# EAGLE board esp32_lora_gateway-Panel (EAGLE 9.0.1), part 1 of 2
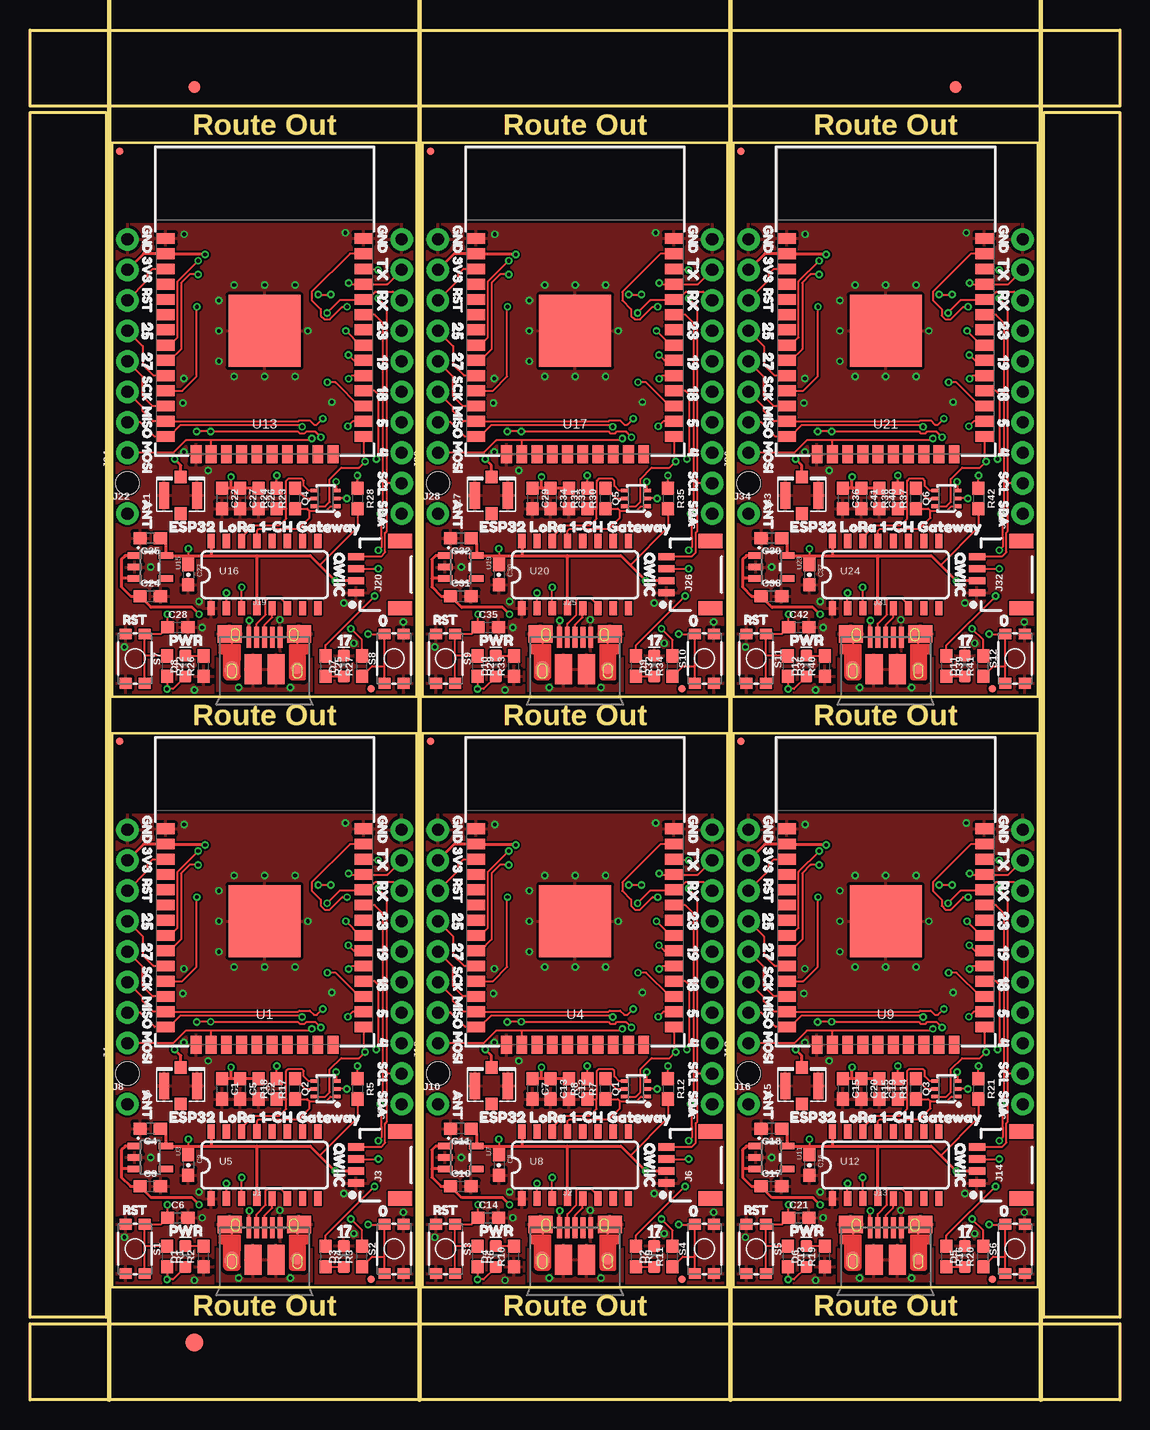
[diagram p0: board, top side]
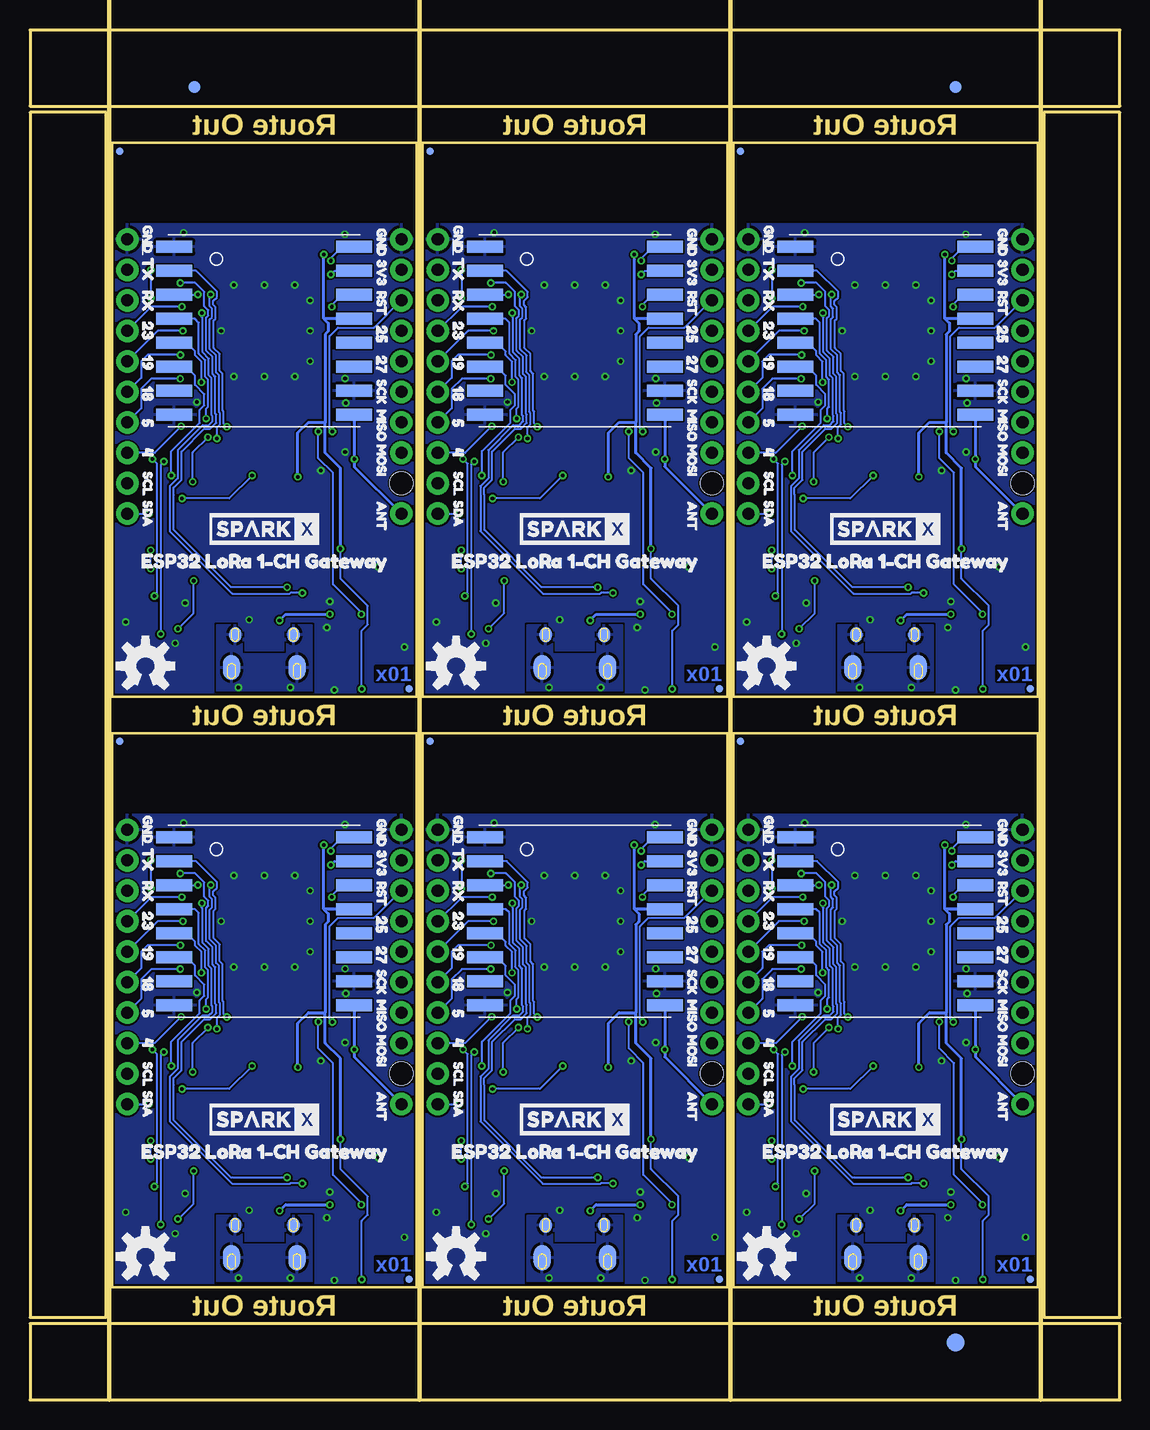
[diagram p1: board, bottom side, seen from below]

Size 90.87 x 114.15 mm. Coordinates in mm from the lower left corner, seen from the top.
Outline: 6.86,9.4 32.24,9.4 32.24,55.55 6.86,55.55 6.86,9.4
Outline: 32.75,9.4 58.13,9.4 58.13,55.55 32.75,55.55 32.75,9.4
Outline: 58.63,9.4 84.01,9.4 84.01,55.55 58.63,55.55 58.63,9.4
Outline: 6.86,58.6 32.24,58.6 32.24,104.75 6.86,104.75 6.86,58.6
Outline: 32.75,58.6 58.13,58.6 58.13,104.75 32.75,104.75 32.75,58.6
Outline: 58.63,58.6 84.01,58.6 84.01,104.75 58.63,104.75 58.63,58.6
Outline: 0,6.35 90.87,6.35 90.87,0 0,0 0,6.35
Outline: 84.52,107.29 90.87,107.29 90.87,6.86 84.52,6.86 84.52,107.29
Outline: 0,114.15 90.87,114.15 90.87,107.8 0,107.8 0,114.15
Outline: 0,107.29 6.35,107.29 6.35,6.86 0,6.86 0,107.29
Copper layers (1*16): Top 0.035mm / dielectric 1.5mm / Bottom 0.035mm
Design rules "SparkFun-2-layer-PCBWay-LIMIT": minimum track width 6mil, minimum drill 0.3mm, track to track 6mil, track to pad 6mil, pad to pad 6mil, via to via 6mil, smd to smd 6mil, copper to edge 6mil, drill to drill 6mil, minimum pad ring 6mil, minimum via ring 6mil, stop-mask expansion 4mil, vias tented up to drill 25mil, thermal gap 10mil
Net classes: 0 default: width 0.152 mm, drill 0.305 mm
Holes 1.93 mm at 8.13,27.18 34.02,27.18 59.9,27.18 8.13,76.38 34.02,76.38 59.9,76.38
Milling: 4 lines

## Footprints (pad centres in the part's own frame; a part is rotated, then mirrored left to right if it is on the bottom)
0603 = smd 1.1 x 1: 1 -0.85,0; 2 0.85,0
0603-CAP = smd 1.1 x 1: 1 -0.85,0; 2 0.85,0
LED-0603 = smd 1 x 1: A -0.877,0; C 0.877,0
FIDUCIAL-1X2 = smd 1 x 1: 1 0,0
FIDUCIAL-1.5X3 = smd 1.5 x 1.5: 1 0,0
FIDUCIAL-MICRO = smd 0.635 x 0.635: 1 0,0
USB-MICROB-PTH-MILL = smd 0.4 x 1.75: D+ 0,0; D- -0.65,0; GND 1.3,0; ID 0.65,0; VBUS -1.3,0 | smd 2 x 1.46: SHIELD -2.9,0.275; SHIELD2 2.9,0.275 | smd 1.425 x 2.5: SHIELD3 -0.963,-2.675; SHIELD4 0.963,-2.675 | smd 1.4 x 2.1 bottom: SHIELD5 -2.731,-2.531; SHIELD7 2.729,-2.531 | smd 1 x 1: SHIELD6 2.7,-2.575 | smd 1.1 x 1.5: SHIELD8 -2.731,-2.731 | smd 1 x 1.3 bottom: SHIELD9 -2.43,0.195; SHIELD10 2.43,0.195
1X04_1MM_RA = smd 0.6 x 1.35: 1 -1.5,0; 2 -0.5,0; 3 0.5,0; 4 1.5,0 | smd 1.2 x 2: NC1 2.8,-3.675; NC2 -2.8,-3.675
1X08_NO_SILK = drill 1.016 pad 1.88: 1 0,0; 2 2.54,0; 3 5.08,0; 4 7.62,0; 5 10.16,0; 6 12.7,0; 7 15.24,0; 8 17.78,0
U.FL = smd 2.2 x 0.85: 1 0,1.375; 2 0,-1.375 | smd 1.05 x 1: FEED 1.525,0; NC -1.525,0
1X01_NO_SILK = drill 1.016 pad 1.88: 1 0,0
1X10_NO_SILK = drill 1.016 pad 1.88: 1 0,0; 2 2.54,0; 3 5.08,0; 4 7.62,0; 5 10.16,0; 6 12.7,0; 7 15.24,0; 8 17.78,0; 9 20.32,0; 10 22.86,0
SC70-6 = smd 0.3 x 0.66: 1 -0.65,-0.92; 2 0,-0.92; 3 0.65,-0.92; 4 0.65,0.92; 5 0,0.92; 6 -0.65,0.92
TACTILE_SWITCH_SMD_4.6X2.8MM = smd 0.9 x 1: 1 -2.05,-0.8; 2 2.05,-0.8; 3 2.05,0.8; 4 -2.05,0.8
ESP-WROOM-32-NARROW = smd 0.9 x 1.5: 1 6.43,8.238; 2 5.16,8.238; 3 3.89,8.238; 4 2.62,8.238; 5 1.35,8.238; 6 0.08,8.238; 7 -1.19,8.238; 8 -2.46,8.238; 9 -3.73,8.238; 10 -5,8.238; 11 -6.27,8.238; 12 -7.54,8.238; 13 -8.81,8.238; 14 -10.08,8.238; 25 -10.08,-8.238; 26 -8.81,-8.238; 27 -7.54,-8.238; 28 -6.27,-8.238; 29 -5,-8.238; 30 -3.73,-8.238; 31 -2.46,-8.238; 32 -1.19,-8.238; 33 0.08,-8.238; 34 1.35,-8.238; 35 2.62,-8.238; 36 3.89,-8.238; 37 5.16,-8.238; 38 6.43,-8.238 | smd 1.5 x 0.9: 15 -11.57,5.715; 16 -11.57,4.445; 17 -11.57,3.175; 18 -11.57,1.905; 19 -11.57,0.635; 20 -11.57,-0.635; 21 -11.57,-1.905; 22 -11.57,-3.175; 23 -11.57,-4.445; 24 -11.57,-5.715 | smd 6 x 6: GND -1.27,0
RFM95/96/97/98W = smd 3 x 1: 3.3V 7.5,1; !RESET -7.5,-3; ANT 7.5,-7; DIO0 7.5,3; DIO1 7.5,5; DIO2 7.5,7; DIO3 7.5,-3; DIO4 7.5,-1; DIO5 -7.5,-5; GND@1 -7.5,7; GND@2 -7.5,-7; GND@3 7.5,-5; MISO -7.5,5; MOSI -7.5,3; NSS -7.5,-1; SCK -7.5,1
SOT23-5 = smd 0.55 x 1.2: 1 -0.95,-1.3; 2 0,-1.3; 3 0.95,-1.3; 4 0.95,1.3; 5 -0.95,1.3
SO016 = smd 0.6 x 1.2: 1 -4.445,-2.8; 2 -3.175,-2.8; 3 -1.905,-2.8; 4 -0.635,-2.8; 5 0.635,-2.8; 6 1.905,-2.8; 7 3.175,-2.8; 8 4.445,-2.8; 9 4.445,2.8; 10 3.175,2.8; 11 1.905,2.8; 12 0.635,2.8; 13 -0.635,2.8; 14 -1.905,2.8; 15 -3.175,2.8; 16 -4.445,2.8

## Placement (x,y rotation side)
C1  4.7uF  [0603]  16,25.91 270 top
C2  10uF  [0603]  19.05,25.91 270 top
C3  1.0uF  [0603]  10.03,17.78 0 top
C4  1.0uF  [0603]  10.03,22.61 180 top
C5  0.1uF  [0603]  17.53,25.91 270 top
C6  0.1uF  [0603]  12.32,15.16 0 top
C7  4.7uF  [0603]  41.89,25.91 270 top
C8  0.1uF  [0603-CAP]  39.1,19.56 270 top
C9  0.1uF  [0603-CAP]  13.21,19.56 270 top
C10  1.0uF  [0603]  35.92,17.78 0 top
C11  1.0uF  [0603]  35.92,22.61 180 top
C12  10uF  [0603]  44.94,25.91 270 top
C13  0.1uF  [0603]  43.41,25.91 270 top
C14  0.1uF  [0603]  38.21,15.16 0 top
C15  4.7uF  [0603]  67.78,25.91 270 top
C16  0.1uF  [0603-CAP]  64.98,19.56 270 top
C17  1.0uF  [0603]  61.81,17.78 0 top
C18  1.0uF  [0603]  61.81,22.61 180 top
C19  10uF  [0603]  70.83,25.91 270 top
C20  0.1uF  [0603]  69.3,25.91 270 top
C21  0.1uF  [0603]  64.09,15.16 0 top
C22  4.7uF  [0603]  16,75.11 270 top
C23  0.1uF  [0603-CAP]  13.21,68.76 270 top
C24  1.0uF  [0603]  10.03,66.98 0 top
C25  1.0uF  [0603]  10.03,71.81 180 top
C26  10uF  [0603]  19.05,75.11 270 top
C27  0.1uF  [0603]  17.53,75.11 270 top
C28  0.1uF  [0603]  12.32,64.36 0 top
C29  4.7uF  [0603]  41.89,75.11 270 top
C30  0.1uF  [0603-CAP]  39.1,68.76 270 top
C31  1.0uF  [0603]  35.92,66.98 0 top
C32  1.0uF  [0603]  35.92,71.81 180 top
C33  10uF  [0603]  44.94,75.11 270 top
C34  0.1uF  [0603]  43.41,75.11 270 top
C35  0.1uF  [0603]  38.21,64.36 0 top
C36  4.7uF  [0603]  67.78,75.11 270 top
C37  0.1uF  [0603-CAP]  64.98,68.76 270 top
C38  1.0uF  [0603]  61.81,66.98 0 top
C39  1.0uF  [0603]  61.81,71.81 180 top
C40  10uF  [0603]  70.83,75.11 270 top
C41  0.1uF  [0603]  69.3,75.11 270 top
C42  0.1uF  [0603]  64.09,64.36 0 top
D1  RED  [LED-0603]  12.95,11.94 90 top
D2  BLUE  [LED-0603]  52.05,11.94 90 top
D3  BLUE  [LED-0603]  26.16,11.94 90 top
D4  RED  [LED-0603]  38.84,11.94 90 top
D5  BLUE  [LED-0603]  77.94,11.94 90 top
D6  RED  [LED-0603]  64.73,11.94 90 top
D7  BLUE  [LED-0603]  26.16,61.14 90 top
D8  RED  [LED-0603]  12.95,61.14 90 top
D9  BLUE  [LED-0603]  52.05,61.14 90 top
D10  RED  [LED-0603]  38.84,61.14 90 top
D11  BLUE  [LED-0603]  77.94,61.14 90 top
D12  RED  [LED-0603]  64.73,61.14 90 top
E$1  [FIDUCIAL-1X2]  13.72,109.39 0 top
E$2  [FIDUCIAL-1X2]  13.72,109.39 0 bottom
E$3  [FIDUCIAL-1X2]  77.16,109.39 0 top
E$4  [FIDUCIAL-1X2]  77.16,109.39 0 bottom
E$5  [FIDUCIAL-1.5X3]  13.72,4.76 0 top
E$6  [FIDUCIAL-1.5X3]  13.72,4.76 0 bottom
FD1  FIDUCIALUFIDUCIAL  [FIDUCIAL-MICRO]  31.62,54.86 0 bottom
FD2  FIDUCIALUFIDUCIAL  [FIDUCIAL-MICRO]  7.49,10.03 0 bottom
FD3  FIDUCIALUFIDUCIAL  [FIDUCIAL-MICRO]  28.45,10.03 0 top
FD4  FIDUCIALUFIDUCIAL  [FIDUCIAL-MICRO]  7.49,54.86 0 top
FD5  FIDUCIALUFIDUCIAL  [FIDUCIAL-MICRO]  57.51,54.86 0 bottom
FD6  FIDUCIALUFIDUCIAL  [FIDUCIAL-MICRO]  33.38,10.03 0 bottom
FD7  FIDUCIALUFIDUCIAL  [FIDUCIAL-MICRO]  54.34,10.03 0 top
FD8  FIDUCIALUFIDUCIAL  [FIDUCIAL-MICRO]  33.38,54.86 0 top
FD9  FIDUCIALUFIDUCIAL  [FIDUCIAL-MICRO]  83.4,54.86 0 bottom
FD10  FIDUCIALUFIDUCIAL  [FIDUCIAL-MICRO]  59.27,10.03 0 bottom
FD11  FIDUCIALUFIDUCIAL  [FIDUCIAL-MICRO]  80.22,10.03 0 top
FD12  FIDUCIALUFIDUCIAL  [FIDUCIAL-MICRO]  59.27,54.86 0 top
FD13  FIDUCIALUFIDUCIAL  [FIDUCIAL-MICRO]  31.62,104.06 0 bottom
FD14  FIDUCIALUFIDUCIAL  [FIDUCIAL-MICRO]  7.49,59.23 0 bottom
FD15  FIDUCIALUFIDUCIAL  [FIDUCIAL-MICRO]  28.45,59.23 0 top
FD16  FIDUCIALUFIDUCIAL  [FIDUCIAL-MICRO]  7.49,104.06 0 top
FD17  FIDUCIALUFIDUCIAL  [FIDUCIAL-MICRO]  57.51,104.06 0 bottom
FD18  FIDUCIALUFIDUCIAL  [FIDUCIAL-MICRO]  33.38,59.23 0 bottom
FD19  FIDUCIALUFIDUCIAL  [FIDUCIAL-MICRO]  54.34,59.23 0 top
FD20  FIDUCIALUFIDUCIAL  [FIDUCIAL-MICRO]  33.38,104.06 0 top
FD21  FIDUCIALUFIDUCIAL  [FIDUCIAL-MICRO]  83.4,104.06 0 bottom
FD22  FIDUCIALUFIDUCIAL  [FIDUCIAL-MICRO]  59.27,59.23 0 bottom
FD23  FIDUCIALUFIDUCIAL  [FIDUCIAL-MICRO]  80.22,59.23 0 top
FD24  FIDUCIALUFIDUCIAL  [FIDUCIAL-MICRO]  59.27,104.06 0 top
J1  [USB-MICROB-PTH-MILL]  19.56,14.35 0 top
J2  [USB-MICROB-PTH-MILL]  45.45,14.35 0 top
J3  [1X04_1MM_RA]  27.18,19.56 90 top
J4  [1X08_NO_SILK]  8.13,29.72 90 top
J5  U.FL  [U.FL]  12.57,26.16 90 top
J6  [1X04_1MM_RA]  53.07,19.56 90 top
J7  U.FL  [U.FL]  38.46,26.16 90 top
J8  [1X01_NO_SILK]  8.13,24.64 0 top
J9  [1X10_NO_SILK]  30.99,24.64 90 top
J10  [1X01_NO_SILK]  34.02,24.64 0 top
J11  [1X10_NO_SILK]  56.88,24.64 90 top
J12  [1X08_NO_SILK]  34.02,29.72 90 top
J13  [USB-MICROB-PTH-MILL]  71.33,14.35 0 top
J14  [1X04_1MM_RA]  78.95,19.56 90 top
J15  U.FL  [U.FL]  64.35,26.16 90 top
J16  [1X01_NO_SILK]  59.9,24.64 0 top
J17  [1X10_NO_SILK]  82.76,24.64 90 top
J18  [1X08_NO_SILK]  59.9,29.72 90 top
J19  [USB-MICROB-PTH-MILL]  19.56,63.55 0 top
J20  [1X04_1MM_RA]  27.18,68.76 90 top
J21  U.FL  [U.FL]  12.57,75.36 90 top
J22  [1X01_NO_SILK]  8.13,73.84 0 top
J23  [1X10_NO_SILK]  30.99,73.84 90 top
J24  [1X08_NO_SILK]  8.13,78.92 90 top
J25  [USB-MICROB-PTH-MILL]  45.45,63.55 0 top
J26  [1X04_1MM_RA]  53.07,68.76 90 top
J27  U.FL  [U.FL]  38.46,75.36 90 top
J28  [1X01_NO_SILK]  34.02,73.84 0 top
J29  [1X10_NO_SILK]  56.88,73.84 90 top
J30  [1X08_NO_SILK]  34.02,78.92 90 top
J31  [USB-MICROB-PTH-MILL]  71.33,63.55 0 top
J32  [1X04_1MM_RA]  78.95,68.76 90 top
J33  U.FL  [U.FL]  64.35,75.36 90 top
J34  [1X01_NO_SILK]  59.9,73.84 0 top
J35  [1X10_NO_SILK]  82.76,73.84 90 top
J36  [1X08_NO_SILK]  59.9,78.92 90 top
LOGO1  SPARKX-LOGO4  [SPARKX-MEDIUM]  19.56,23.37 0 bottom
LOGO2  OSHW-LOGOM  [OSHW-LOGO-M]  29.46,11.94 0 bottom
LOGO3  SPARKX-LOGO4  [SPARKX-MEDIUM]  45.45,23.37 0 bottom
LOGO4  OSHW-LOGOM  [OSHW-LOGO-M]  55.35,11.94 0 bottom
LOGO5  SPARKX-LOGO4  [SPARKX-MEDIUM]  71.33,23.37 0 bottom
LOGO6  OSHW-LOGOM  [OSHW-LOGO-M]  81.24,11.94 0 bottom
LOGO7  SPARKX-LOGO4  [SPARKX-MEDIUM]  19.56,72.57 0 bottom
LOGO8  OSHW-LOGOM  [OSHW-LOGO-M]  29.46,61.14 0 bottom
LOGO9  SPARKX-LOGO4  [SPARKX-MEDIUM]  45.45,72.57 0 bottom
LOGO10  OSHW-LOGOM  [OSHW-LOGO-M]  55.35,61.14 0 bottom
LOGO11  SPARKX-LOGO4  [SPARKX-MEDIUM]  71.33,72.57 0 bottom
LOGO12  OSHW-LOGOM  [OSHW-LOGO-M]  81.24,61.14 0 bottom
Q1  MBT3904DW1T1  [SC70-6]  50.53,25.91 90 top
Q2  MBT3904DW1T1  [SC70-6]  24.64,25.91 90 top
Q3  MBT3904DW1T1  [SC70-6]  76.41,25.91 90 top
Q4  MBT3904DW1T1  [SC70-6]  24.64,75.11 90 top
Q5  MBT3904DW1T1  [SC70-6]  50.53,75.11 90 top
Q6  MBT3904DW1T1  [SC70-6]  76.41,75.11 90 top
R1  10k  [0603]  11.43,11.94 270 top
R2  1k  [0603]  14.48,11.94 90 top
R3  10k  [0603]  27.69,11.94 90 top
R4  1k  [0603]  24.64,11.94 270 top
R5  10k  [0603]  27.3,25.91 270 top
R6  10k  [0603]  37.32,11.94 270 top
R7  10k  [0603]  47.99,25.91 90 top
R8  10k  [0603]  46.46,25.91 90 top
R9  1k  [0603]  50.53,11.94 270 top
R10  1k  [0603]  40.37,11.94 90 top
R11  10k  [0603]  53.57,11.94 90 top
R12  10k  [0603]  53.19,25.91 270 top
R13  10k  [0603]  63.21,11.94 270 top
R14  10k  [0603]  73.87,25.91 90 top
R15  10k  [0603]  72.35,25.91 90 top
R16  1k  [0603]  76.41,11.94 270 top
R17  10k  [0603]  22.1,25.91 90 top
R18  10k  [0603]  20.57,25.91 90 top
R19  1k  [0603]  66.25,11.94 90 top
R20  10k  [0603]  79.46,11.94 90 top
R21  10k  [0603]  79.08,25.91 270 top
R22  10k  [0603]  11.43,61.14 270 top
R23  10k  [0603]  22.1,75.11 90 top
R24  10k  [0603]  20.57,75.11 90 top
R25  1k  [0603]  24.64,61.14 270 top
R26  1k  [0603]  14.48,61.14 90 top
R27  10k  [0603]  27.69,61.14 90 top
R28  10k  [0603]  27.3,75.11 270 top
R29  10k  [0603]  37.32,61.14 270 top
R30  10k  [0603]  47.99,75.11 90 top
R31  10k  [0603]  46.46,75.11 90 top
R32  1k  [0603]  50.53,61.14 270 top
R33  1k  [0603]  40.37,61.14 90 top
R34  10k  [0603]  53.57,61.14 90 top
R35  10k  [0603]  53.19,75.11 270 top
R36  10k  [0603]  63.21,61.14 270 top
R37  10k  [0603]  73.87,75.11 90 top
R38  10k  [0603]  72.35,75.11 90 top
R39  1k  [0603]  76.41,61.14 270 top
R40  1k  [0603]  66.25,61.14 90 top
R41  10k  [0603]  79.46,61.14 90 top
R42  10k  [0603]  79.08,75.11 270 top
S1  RESET  [TACTILE_SWITCH_SMD_4.6X2.8MM]  8.76,12.57 270 top
S2  RESET  [TACTILE_SWITCH_SMD_4.6X2.8MM]  30.35,12.57 90 top
S3  RESET  [TACTILE_SWITCH_SMD_4.6X2.8MM]  34.65,12.57 270 top
S4  RESET  [TACTILE_SWITCH_SMD_4.6X2.8MM]  56.24,12.57 90 top
S5  RESET  [TACTILE_SWITCH_SMD_4.6X2.8MM]  60.54,12.57 270 top
S6  RESET  [TACTILE_SWITCH_SMD_4.6X2.8MM]  82.13,12.57 90 top
S7  RESET  [TACTILE_SWITCH_SMD_4.6X2.8MM]  8.76,61.77 270 top
S8  RESET  [TACTILE_SWITCH_SMD_4.6X2.8MM]  30.35,61.77 90 top
S9  RESET  [TACTILE_SWITCH_SMD_4.6X2.8MM]  34.65,61.77 270 top
S10  RESET  [TACTILE_SWITCH_SMD_4.6X2.8MM]  56.24,61.77 90 top
S11  RESET  [TACTILE_SWITCH_SMD_4.6X2.8MM]  60.54,61.77 270 top
S12  RESET  [TACTILE_SWITCH_SMD_4.6X2.8MM]  82.13,61.77 90 top
U1  ESP-WROOM-32NARROW  [ESP-WROOM-32-NARROW]  19.56,41.15 90 top
U2  RFM96W  [RFM95/96/97/98W]  19.56,39.88 0 bottom
U3  3.3V  [SOT23-5]  10.03,20.19 270 top
U4  ESP-WROOM-32NARROW  [ESP-WROOM-32-NARROW]  45.45,41.15 90 top
U5  CH340C  [SO016]  19.56,19.56 0 top
U6  RFM96W  [RFM95/96/97/98W]  45.45,39.88 0 bottom
U7  3.3V  [SOT23-5]  35.92,20.19 270 top
U8  CH340C  [SO016]  45.45,19.56 0 top
U9  ESP-WROOM-32NARROW  [ESP-WROOM-32-NARROW]  71.33,41.15 90 top
U10  RFM96W  [RFM95/96/97/98W]  71.33,39.88 0 bottom
U11  3.3V  [SOT23-5]  61.81,20.19 270 top
U12  CH340C  [SO016]  71.33,19.56 0 top
U13  ESP-WROOM-32NARROW  [ESP-WROOM-32-NARROW]  19.56,90.35 90 top
U14  RFM96W  [RFM95/96/97/98W]  19.56,89.08 0 bottom
U15  3.3V  [SOT23-5]  10.03,69.39 270 top
U16  CH340C  [SO016]  19.56,68.76 0 top
U17  ESP-WROOM-32NARROW  [ESP-WROOM-32-NARROW]  45.45,90.35 90 top
U18  RFM96W  [RFM95/96/97/98W]  45.45,89.08 0 bottom
U19  3.3V  [SOT23-5]  35.92,69.39 270 top
U20  CH340C  [SO016]  45.45,68.76 0 top
U21  ESP-WROOM-32NARROW  [ESP-WROOM-32-NARROW]  71.33,90.35 90 top
U22  RFM96W  [RFM95/96/97/98W]  71.33,89.08 0 bottom
U23  3.3V  [SOT23-5]  61.81,69.39 270 top
U24  CH340C  [SO016]  71.33,68.76 0 top
U$1  [GND0]  9.78,49.34 270 top
U$2  [3V31]  9.78,46.74 270 top
U$3  [RST2]  9.78,44.13 270 top
U$4  [2517]  9.78,41.4 270 top
U$5  [279]  9.78,38.86 270 top
U$6  [SCK3]  9.78,36.77 270 top
U$7  [MISO4]  9.78,34.29 270 top
U$8  [MOSI5]  9.78,31.37 270 top
U$9  [ANT6]  9.78,26.52 270 top
U$10  [GND0]  29.4,49.34 270 top
U$11  [TX16]  29.4,46.74 270 top
U$12  [RX15]  29.4,44.07 270 top
U$13  [2314]  29.4,41.47 270 top
U$14  [1912]  29.4,38.61 270 top
U$15  [1811]  29.4,36.07 270 top
U$16  [513]  29.4,33.34 270 top
U$17  [410]  29.4,30.92 270 top
U$18  [SCL8]  29.4,28.83 270 top
U$19  [SDA7]  29.4,26.42 270 top
U$20  [RST2]  7.05,15.81 0 top
U$21  [020]  28.26,15.75 0 top
U$22  [PWR19]  10.79,14.1 0 top
U$23  [1722]  24.83,14.1 0 top
U$24  [QWIIC18]  25.78,22.35 270 top
U$25  [ESP32_LORA_1#CH_GATEWAY21]  10.79,23.56 0 top
U$26  [GND0]  29.27,49.34 270 bottom
U$27  [TX16]  29.27,46.74 270 bottom
U$28  [RX15]  29.27,44.07 270 bottom
U$29  [2314]  29.27,41.47 270 bottom
U$30  [1912]  29.27,38.61 270 bottom
U$31  [1811]  29.27,36.07 270 bottom
U$32  [513]  29.27,33.34 270 bottom
U$33  [410]  29.27,30.92 270 bottom
U$34  [SCL8]  29.27,28.83 270 bottom
U$35  [SDA7]  29.27,26.42 270 bottom
U$36  [ANT6]  9.78,26.39 270 bottom
U$37  [GND0]  9.78,49.09 270 bottom
U$38  [3V31]  9.78,46.48 270 bottom
U$39  [RST2]  9.78,43.88 270 bottom
U$40  [2517]  9.78,41.15 270 bottom
U$41  [279]  9.78,38.61 270 bottom
U$42  [SCK3]  9.78,36.51 270 bottom
U$43  [MISO4]  9.78,34.04 270 bottom
U$44  [MOSI5]  9.78,31.11 270 bottom
U$45  [ESP32_LORA_1#CH_GATEWAY23]  30.86,20.7 0 bottom
U$46  [ANT6]  35.67,26.52 270 top
U$47  [GND0]  35.67,49.34 270 top
U$48  [3V31]  35.67,46.74 270 top
U$49  [RST2]  35.67,44.13 270 top
U$50  [2517]  35.67,41.4 270 top
U$51  [279]  35.67,38.86 270 top
U$52  [SCK3]  35.67,36.77 270 top
U$53  [MISO4]  35.67,34.29 270 top
U$54  [MOSI5]  35.67,31.37 270 top
U$55  [GND0]  55.29,49.34 270 top
U$56  [TX16]  55.29,46.74 270 top
U$57  [RX15]  55.29,44.07 270 top
U$58  [2314]  55.29,41.47 270 top
U$59  [1912]  55.29,38.61 270 top
U$60  [1811]  55.29,36.07 270 top
U$61  [513]  55.29,33.34 270 top
U$62  [410]  55.29,30.92 270 top
U$63  [SCL8]  55.29,28.83 270 top
U$64  [SDA7]  55.29,26.42 270 top
U$65  [RST2]  32.94,15.81 0 top
U$66  [020]  54.15,15.75 0 top
U$67  [PWR19]  36.68,14.1 0 top
U$68  [1722]  50.72,14.1 0 top
U$69  [QWIIC18]  51.67,22.35 270 top
U$70  [ESP32_LORA_1#CH_GATEWAY21]  36.68,23.56 0 top
U$71  [GND0]  55.16,49.34 270 bottom
U$72  [TX16]  55.16,46.74 270 bottom
U$73  [RX15]  55.16,44.07 270 bottom
U$74  [2314]  55.16,41.47 270 bottom
U$75  [1912]  55.16,38.61 270 bottom
U$76  [1811]  55.16,36.07 270 bottom
U$77  [513]  55.16,33.34 270 bottom
U$78  [410]  55.16,30.92 270 bottom
U$79  [SCL8]  55.16,28.83 270 bottom
U$80  [SDA7]  55.16,26.42 270 bottom
U$81  [ANT6]  35.67,26.39 270 bottom
U$82  [GND0]  35.67,49.09 270 bottom
U$83  [3V31]  35.67,46.48 270 bottom
U$84  [RST2]  35.67,43.88 270 bottom
U$85  [2517]  35.67,41.15 270 bottom
U$86  [279]  35.67,38.61 270 bottom
U$87  [SCK3]  35.67,36.51 270 bottom
U$88  [MISO4]  35.67,34.04 270 bottom
U$89  [MOSI5]  35.67,31.11 270 bottom
U$90  [ESP32_LORA_1#CH_GATEWAY23]  56.75,20.7 0 bottom
U$91  [ANT6]  61.55,26.52 270 top
U$92  [GND0]  61.55,49.34 270 top
U$93  [3V31]  61.55,46.74 270 top
U$94  [RST2]  61.55,44.13 270 top
U$95  [2517]  61.55,41.4 270 top
U$96  [279]  61.55,38.86 270 top
U$97  [SCK3]  61.55,36.77 270 top
U$98  [MISO4]  61.55,34.29 270 top
U$99  [MOSI5]  61.55,31.37 270 top
U$100  [GND0]  81.18,49.34 270 top
U$101  [TX16]  81.18,46.74 270 top
U$102  [RX15]  81.18,44.07 270 top
U$103  [2314]  81.18,41.47 270 top
U$104  [1912]  81.18,38.61 270 top
U$105  [1811]  81.18,36.07 270 top
U$106  [513]  81.18,33.34 270 top
U$107  [410]  81.18,30.92 270 top
U$108  [SCL8]  81.18,28.83 270 top
U$109  [SDA7]  81.18,26.42 270 top
U$110  [RST2]  58.82,15.81 0 top
U$111  [020]  80.03,15.75 0 top
U$112  [PWR19]  62.57,14.1 0 top
U$113  [1722]  76.6,14.1 0 top
U$114  [QWIIC18]  77.56,22.35 270 top
U$115  [ESP32_LORA_1#CH_GATEWAY21]  62.57,23.56 0 top
U$116  [GND0]  81.05,49.34 270 bottom
U$117  [TX16]  81.05,46.74 270 bottom
U$118  [RX15]  81.05,44.07 270 bottom
U$119  [2314]  81.05,41.47 270 bottom
U$120  [1912]  81.05,38.61 270 bottom
U$121  [1811]  81.05,36.07 270 bottom
U$122  [513]  81.05,33.34 270 bottom
U$123  [410]  81.05,30.92 270 bottom
U$124  [SCL8]  81.05,28.83 270 bottom
U$125  [SDA7]  81.05,26.42 270 bottom
U$126  [ANT6]  61.55,26.39 270 bottom
U$127  [GND0]  61.55,49.09 270 bottom
U$128  [3V31]  61.55,46.48 270 bottom
U$129  [RST2]  61.55,43.88 270 bottom
U$130  [2517]  61.55,41.15 270 bottom
U$131  [279]  61.55,38.61 270 bottom
U$132  [SCK3]  61.55,36.51 270 bottom
U$133  [MISO4]  61.55,34.04 270 bottom
U$134  [MOSI5]  61.55,31.11 270 bottom
U$135  [ESP32_LORA_1#CH_GATEWAY23]  82.64,20.7 0 bottom
U$136  [ANT6]  9.78,75.72 270 top
U$137  [GND0]  9.78,98.54 270 top
U$138  [3V31]  9.78,95.94 270 top
U$139  [RST2]  9.78,93.33 270 top
U$140  [2517]  9.78,90.6 270 top
U$141  [279]  9.78,88.06 270 top
U$142  [SCK3]  9.78,85.97 270 top
U$143  [MISO4]  9.78,83.49 270 top
U$144  [MOSI5]  9.78,80.57 270 top
U$145  [GND0]  29.4,98.54 270 top
U$146  [TX16]  29.4,95.94 270 top
U$147  [RX15]  29.4,93.27 270 top
U$148  [2314]  29.4,90.67 270 top
U$149  [1912]  29.4,87.81 270 top
U$150  [1811]  29.4,85.27 270 top
U$151  [513]  29.4,82.54 270 top
U$152  [410]  29.4,80.12 270 top
U$153  [SCL8]  29.4,78.03 270 top
U$154  [SDA7]  29.4,75.62 270 top
U$155  [RST2]  7.05,65.01 0 top
U$156  [020]  28.26,64.95 0 top
U$157  [PWR19]  10.79,63.3 0 top
U$158  [1722]  24.83,63.3 0 top
U$159  [QWIIC18]  25.78,71.55 270 top
U$160  [ESP32_LORA_1#CH_GATEWAY21]  10.79,72.76 0 top
U$161  [GND0]  29.27,98.54 270 bottom
U$162  [TX16]  29.27,95.94 270 bottom
U$163  [RX15]  29.27,93.27 270 bottom
U$164  [2314]  29.27,90.67 270 bottom
U$165  [1912]  29.27,87.81 270 bottom
U$166  [1811]  29.27,85.27 270 bottom
U$167  [513]  29.27,82.54 270 bottom
U$168  [410]  29.27,80.12 270 bottom
U$169  [SCL8]  29.27,78.03 270 bottom
U$170  [SDA7]  29.27,75.62 270 bottom
U$171  [ANT6]  9.78,75.59 270 bottom
U$172  [GND0]  9.78,98.29 270 bottom
U$173  [3V31]  9.78,95.68 270 bottom
U$174  [RST2]  9.78,93.08 270 bottom
U$175  [2517]  9.78,90.35 270 bottom
U$176  [279]  9.78,87.81 270 bottom
U$177  [SCK3]  9.78,85.71 270 bottom
U$178  [MISO4]  9.78,83.24 270 bottom
U$179  [MOSI5]  9.78,80.32 270 bottom
U$180  [ESP32_LORA_1#CH_GATEWAY23]  30.86,69.9 0 bottom
U$181  [ANT6]  35.67,75.72 270 top
U$182  [GND0]  35.67,98.54 270 top
U$183  [3V31]  35.67,95.94 270 top
U$184  [RST2]  35.67,93.33 270 top
U$185  [2517]  35.67,90.6 270 top
U$186  [279]  35.67,88.06 270 top
U$187  [SCK3]  35.67,85.97 270 top
U$188  [MISO4]  35.67,83.49 270 top
U$189  [MOSI5]  35.67,80.57 270 top
U$190  [GND0]  55.29,98.54 270 top
U$191  [TX16]  55.29,95.94 270 top
U$192  [RX15]  55.29,93.27 270 top
U$193  [2314]  55.29,90.67 270 top
U$194  [1912]  55.29,87.81 270 top
U$195  [1811]  55.29,85.27 270 top
U$196  [513]  55.29,82.54 270 top
U$197  [410]  55.29,80.12 270 top
U$198  [SCL8]  55.29,78.03 270 top
U$199  [SDA7]  55.29,75.62 270 top
U$200  [RST2]  32.94,65.01 0 top
U$201  [020]  54.15,64.95 0 top
U$202  [PWR19]  36.68,63.3 0 top
U$203  [1722]  50.72,63.3 0 top
U$204  [QWIIC18]  51.67,71.55 270 top
U$205  [ESP32_LORA_1#CH_GATEWAY21]  36.68,72.76 0 top
U$206  [GND0]  55.16,98.54 270 bottom
U$207  [TX16]  55.16,95.94 270 bottom
U$208  [RX15]  55.16,93.27 270 bottom
U$209  [2314]  55.16,90.67 270 bottom
U$210  [1912]  55.16,87.81 270 bottom
U$211  [1811]  55.16,85.27 270 bottom
U$212  [513]  55.16,82.54 270 bottom
U$213  [410]  55.16,80.12 270 bottom
U$214  [SCL8]  55.16,78.03 270 bottom
U$215  [SDA7]  55.16,75.62 270 bottom
U$216  [ANT6]  35.67,75.59 270 bottom
U$217  [GND0]  35.67,98.29 270 bottom
U$218  [3V31]  35.67,95.68 270 bottom
U$219  [RST2]  35.67,93.08 270 bottom
U$220  [2517]  35.67,90.35 270 bottom
U$221  [279]  35.67,87.81 270 bottom
U$222  [SCK3]  35.67,85.71 270 bottom
U$223  [MISO4]  35.67,83.24 270 bottom
U$224  [MOSI5]  35.67,80.32 270 bottom
U$225  [ESP32_LORA_1#CH_GATEWAY23]  56.75,69.9 0 bottom
U$226  [ANT6]  61.55,75.72 270 top
U$227  [GND0]  61.55,98.54 270 top
U$228  [3V31]  61.55,95.94 270 top
U$229  [RST2]  61.55,93.33 270 top
U$230  [2517]  61.55,90.6 270 top
U$231  [279]  61.55,88.06 270 top
U$232  [SCK3]  61.55,85.97 270 top
U$233  [MISO4]  61.55,83.49 270 top
U$234  [MOSI5]  61.55,80.57 270 top
U$235  [GND0]  81.18,98.54 270 top
U$236  [TX16]  81.18,95.94 270 top
U$237  [RX15]  81.18,93.27 270 top
U$238  [2314]  81.18,90.67 270 top
U$239  [1912]  81.18,87.81 270 top
U$240  [1811]  81.18,85.27 270 top
U$241  [513]  81.18,82.54 270 top
U$242  [410]  81.18,80.12 270 top
U$243  [SCL8]  81.18,78.03 270 top
U$244  [SDA7]  81.18,75.62 270 top
U$245  [RST2]  58.82,65.01 0 top
U$246  [020]  80.03,64.95 0 top
U$247  [PWR19]  62.57,63.3 0 top
U$248  [1722]  76.6,63.3 0 top
U$249  [QWIIC18]  77.56,71.55 270 top
U$250  [ESP32_LORA_1#CH_GATEWAY21]  62.57,72.76 0 top
U$251  [GND0]  81.05,98.54 270 bottom
U$252  [TX16]  81.05,95.94 270 bottom
U$253  [RX15]  81.05,93.27 270 bottom
U$254  [2314]  81.05,90.67 270 bottom
U$255  [1912]  81.05,87.81 270 bottom
U$256  [1811]  81.05,85.27 270 bottom
U$257  [513]  81.05,82.54 270 bottom
U$258  [410]  81.05,80.12 270 bottom
U$259  [SCL8]  81.05,78.03 270 bottom
U$260  [SDA7]  81.05,75.62 270 bottom
U$261  [ANT6]  61.55,75.59 270 bottom
U$262  [GND0]  61.55,98.29 270 bottom
U$263  [3V31]  61.55,95.68 270 bottom
U$264  [RST2]  61.55,93.08 270 bottom
U$265  [2517]  61.55,90.35 270 bottom
U$266  [279]  61.55,87.81 270 bottom
U$267  [SCK3]  61.55,85.71 270 bottom
U$268  [MISO4]  61.55,83.24 270 bottom
U$269  [MOSI5]  61.55,80.32 270 bottom
U$270  [ESP32_LORA_1#CH_GATEWAY23]  82.64,69.9 0 bottom

## Library data of the parts
C1 C7 C15 C22 C29 C36 = SparkFun-Capacitors; PROD_ID: CAP-08280
C2 C12 C19 C26 C33 C40 = SparkFun-Capacitors; PROD_ID: CAP-11015
C3 C4 C10 C11 C17 C18 C24 C25 C31 C32 C38 C39 = SparkFun-Capacitors; PROD_ID: CAP-00868
C5 C6 C8 C9 C13 C14 C16 C20 C21 C23 C27 C28 C30 C34 C35 C37 C41 C42 = SparkFun-Capacitors; PROD_ID: CAP-00810
D1 D4 D6 D8 D10 D12 = SparkFun-LED; PROD_ID: DIO-00819
D2 D3 D5 D7 D9 D11 = SparkFun-LED; PROD_ID: DIO-08575
E$1-E$4 FD1-FD24 LOGO2 LOGO4 LOGO6 LOGO8 LOGO10 LOGO12 = SparkFun-Aesthetics
E$5 E$6 = SparkFun-Retired
J1 J2 J13 J19 J25 J31 = SparkFun-Connectors; PROD_ID: CONN-13711
J3 J6 J14 J20 J26 J32 = SparkFun-Connectors; PROD_ID: CONN-13694
J4 J12 J18 J24 J30 J36 = SparkFun-Connectors; PROD_ID: CONN-08438
J5 J7 J15 J21 J27 J33 = SparkFun-Connectors; PROD_ID: CONN-09193; SF_ID: WRL-09144
J8 J10 J16 J22 J28 J34 = SparkFun-Connectors
J9 J11 J17 J23 J29 J35 = SparkFun-Connectors; PROD_ID: CONN-11563
LOGO1 LOGO3 LOGO5 LOGO7 LOGO9 LOGO11 U2 U6 U10 U14 U18 U22 = SparkX
Q1-Q6 = esp32-thing-temp; PROD_ID: TRANS-13337
R1 R3 R5-R8 R11-R15 R17 R18 R20-R24 R27-R31 R34-R38 R41 R42 = SparkFun-Resistors; PROD_ID: RES-00824
R2 R4 R9 R10 R16 R19 R25 R26 R32 R33 R39 R40 = SparkFun-Resistors; PROD_ID: RES-07856
S1-S12 = SparkFun-Switches; PROD_ID: SWCH-13065
U1 U4 U9 U13 U17 U21 = esp32_lora_gateway
U3 U7 U11 U15 U19 U23 = SparkFun-IC-Power; PROD_ID: VREG-12457
U5 U8 U12 U16 U20 U24 = SparkFun-IC-Comms; PROD_ID: IC-14038
U$1-U$270 = buzzard_labels

## Nets
0: Q2.6 R3.1 S2.3 S2.4 U1.25
1: Q1.6 R11.1 S4.3 S4.4 U4.25
2: Q3.6 R20.1 S6.3 S6.4 U9.25
3: Q4.6 R27.1 S8.3 S8.4 U13.25
3.3V: C1.1 C2.1 C4.1 C5.1 C9.1 D1.A J3.2 J4.7 R1.2 R3.2 R5.2 U1.2 U2.3.3V U3.5 U5.4 U5.16
3.3V1: C7.1 C8.1 C11.1 C12.1 C13.1 D4.A J6.2 J12.7 R6.2 R11.2 R12.2 U4.2 U6.3.3V U7.5 U8.4 U8.16
3.3V2: C15.1 C16.1 C18.1 C19.1 C20.1 D6.A J14.2 J18.7 R13.2 R20.2 R21.2 U9.2 U10.3.3V U11.5 U12.4 U12.16
3.3V3: C22.1 C23.1 C25.1 C26.1 C27.1 D8.A J20.2 J24.7 R22.2 R27.2 R28.2 U13.2 U14.3.3V U15.5 U16.4 U16.16
3.3V4: C29.1 C30.1 C32.1 C33.1 C34.1 D10.A J26.2 J30.7 R29.2 R34.2 R35.2 U17.2 U18.3.3V U19.5 U20.4 U20.16
3.3V5: C36.1 C37.1 C39.1 C40.1 C41.1 D12.A J32.2 J36.7 R36.2 R41.2 R42.2 U21.2 U22.3.3V U23.5 U24.4 U24.16
4: Q5.6 R34.1 S10.3 S10.4 U17.25
5: Q6.6 R41.1 S12.3 S12.4 U21.25
!DTR: Q2.1 R17.1 U5.13
!DTR1: Q1.1 R7.1 U8.13
!DTR2: Q3.1 R14.1 U12.13
!DTR3: Q4.1 R23.1 U16.13
!DTR4: Q5.1 R30.1 U20.13
!DTR5: Q6.1 R37.1 U24.13
!RTS: Q2.4 R18.1 U5.14
!RTS1: Q1.4 R8.1 U8.14
!RTS2: Q3.4 R15.1 U12.14
!RTS3: Q4.4 R24.1 U16.14
!RTS4: Q5.4 R31.1 U20.14
!RTS5: Q6.4 R38.1 U24.14
ANT: J5.FEED J8.1 U2.ANT
ANT1: J7.FEED J10.1 U6.ANT
ANT2: J15.FEED J16.1 U10.ANT
ANT3: J21.FEED J22.1 U14.ANT
ANT4: J27.FEED J28.1 U18.ANT
ANT5: J33.FEED J34.1 U22.ANT
D+: J1.D+ U5.5
D+1: J2.D+ U8.5
D+2: J13.D+ U12.5
D+3: J19.D+ U16.5
D+4: J25.D+ U20.5
D+5: J31.D+ U24.5
D-: J1.D- U5.6
D-1: J2.D- U8.6
D-2: J13.D- U12.6
D-3: J19.D- U16.6
D-4: J25.D- U20.6
D-5: J31.D- U24.6
GND: C1.2 C2.2 C3.2 C4.2 C5.2 C6.2 C9.2 D3.C J1.GND J3.1 J4.8 J5.1 J5.2 J9.10 R2.1 S1.1 S1.2 S2.1 S2.2 U1.1 U1.15 U1.38 U1.GND U2.GND@1 U2.GND@2 U2.GND@3 U3.2 U5.1
GND1: C7.2 C8.2 C10.2 C11.2 C12.2 C13.2 C14.2 D2.C J2.GND J6.1 J7.1 J7.2 J11.10 J12.8 R10.1 S3.1 S3.2 S4.1 S4.2 U4.1 U4.15 U4.38 U4.GND U6.GND@1 U6.GND@2 U6.GND@3 U7.2 U8.1
GND2: C15.2 C16.2 C17.2 C18.2 C19.2 C20.2 C21.2 D5.C J13.GND J14.1 J15.1 J15.2 J17.10 J18.8 R19.1 S5.1 S5.2 S6.1 S6.2 U9.1 U9.15 U9.38 U9.GND U10.GND@1 U10.GND@2 U10.GND@3 U11.2 U12.1
GND3: C22.2 C23.2 C24.2 C25.2 C26.2 C27.2 C28.2 D7.C J19.GND J20.1 J21.1 J21.2 J23.10 J24.8 R26.1 S7.1 S7.2 S8.1 S8.2 U13.1 U13.15 U13.38 U13.GND U14.GND@1 U14.GND@2 U14.GND@3 U15.2 U16.1
GND4: C29.2 C30.2 C31.2 C32.2 C33.2 C34.2 C35.2 D9.C J25.GND J26.1 J27.1 J27.2 J29.10 J30.8 R33.1 S9.1 S9.2 S10.1 S10.2 U17.1 U17.15 U17.38 U17.GND U18.GND@1 U18.GND@2 U18.GND@3 U19.2 U20.1
GND5: C36.2 C37.2 C38.2 C39.2 C40.2 C41.2 C42.2 D11.C J31.GND J32.1 J33.1 J33.2 J35.10 J36.8 R40.1 S11.1 S11.2 S12.1 S12.2 U21.1 U21.15 U21.38 U21.GND U22.GND@1 U22.GND@2 U22.GND@3 U23.2 U24.1
IO1: J12.5 U4.10
IO2: J12.4 U4.12
IO3: J11.6 U4.31
IO4: J9.3 U1.26
IO5: J9.4 U1.29
IO6: J11.5 U4.30
IO7: J11.4 U4.29
IO8: J11.7 U4.37
IO9: J11.3 U4.26
IO10: R9.1 U4.28
IO11: J18.5 U9.10
IO12: J18.4 U9.12
IO13: J17.6 U9.31
IO14: J17.5 U9.30
IO15: J17.4 U9.29
IO16: J17.7 U9.37
IO17: R4.1 U1.28
IO18: J9.5 U1.30
IO19: J9.6 U1.31
IO20: J17.3 U9.26
IO21: R16.1 U9.28
IO22: J24.5 U13.10
IO23: J9.7 U1.37
IO24: J24.4 U13.12
IO25: J4.5 U1.10
IO26: J23.6 U13.31
IO27: J4.4 U1.12
IO28: J23.5 U13.30
IO29: J23.4 U13.29
IO30: J23.7 U13.37
IO31: J23.3 U13.26
IO32: R25.1 U13.28
IO33: J30.5 U17.10
IO34: J30.4 U17.12
IO35: J29.6 U17.31
IO36: J29.5 U17.30
IO37: J29.4 U17.29
IO38: J29.7 U17.37
IO39: J29.3 U17.26
IO40: R32.1 U17.28
IO41: J36.5 U21.10
IO42: J36.4 U21.12
IO43: J35.6 U21.31
IO44: J35.5 U21.30
IO45: J35.4 U21.29
IO46: J35.7 U21.37
IO47: J35.3 U21.26
IO48: R39.1 U21.28
MISO: J4.2 U1.14 U2.MISO
MISO1: J12.2 U4.14 U6.MISO
MISO2: J18.2 U9.14 U10.MISO
MISO3: J24.2 U13.14 U14.MISO
MISO4: J30.2 U17.14 U18.MISO
MISO5: J36.2 U21.14 U22.MISO
MOSI: J4.1 U1.16 U2.MOSI
MOSI1: J12.1 U4.16 U6.MOSI
MOSI2: J18.1 U9.16 U10.MOSI
MOSI3: J24.1 U13.16 U14.MOSI
MOSI4: J30.1 U17.16 U18.MOSI
MOSI5: J36.1 U21.16 U22.MOSI
N$1: D1.C R2.2
N$2: D3.A R4.2
N$3: Q1.5 R7.2
N$4: Q1.2 R8.2
N$5: D2.A R9.2
N$6: D4.C R10.2
N$7: Q3.5 R14.2
N$8: Q3.2 R15.2
N$9: D5.A R16.2
N$10: Q2.5 R17.2
N$11: D6.C R19.2
N$12: Q2.2 R18.2
N$13: Q4.5 R23.2
N$14: Q4.2 R24.2
N$15: D7.A R25.2
N$16: D8.C R26.2
N$17: Q5.5 R30.2
N$18: Q5.2 R31.2
N$19: D9.A R32.2
N$20: D10.C R33.2
N$21: Q6.5 R37.2
N$22: Q6.2 R38.2
N$23: D11.A R39.2
N$24: D12.C R40.2
RESET: C6.1 J4.6 Q2.3 R1.1 S1.3 S1.4 U1.3
RESET1: C14.1 J12.6 Q1.3 R6.1 S3.3 S3.4 U4.3
RESET2: C21.1 J18.6 Q3.3 R13.1 S5.3 S5.4 U9.3
RESET3: C28.1 J24.6 Q4.3 R22.1 S7.3 S7.4 U13.3
RESET4: C35.1 J30.6 Q5.3 R29.1 S9.3 S9.4 U17.3
RESET5: C42.1 J36.6 Q6.3 R36.1 S11.3 S11.4 U21.3
RFM_CS: U1.27 U2.NSS
RFM_CS1: U4.27 U6.NSS
RFM_CS2: U9.27 U10.NSS
RFM_CS3: U13.27 U14.NSS
RFM_CS4: U17.27 U18.NSS
RFM_CS5: U21.27 U22.NSS
RFM_DIO1/1: U4.9 U6.DIO1
RFM_DIO1/2: U9.9 U10.DIO1
RFM_DIO1/3: U13.9 U14.DIO1
RFM_DIO1/4: U17.9 U18.DIO1
RFM_DIO1/5: U21.9 U22.DIO1
RFM_DIO1/33: U1.9 U2.DIO1
RFM_DIO2/1: U4.8 U6.DIO2
RFM_DIO2/2: U9.8 U10.DIO2
RFM_DIO2/3: U13.8 U14.DIO2
RFM_DIO2/4: U17.8 U18.DIO2
RFM_DIO2/5: U21.8 U22.DIO2
RFM_DIO2/32: U1.8 U2.DIO2
RFM_INT/1: U4.11 U6.DIO0
RFM_INT/2: U9.11 U10.DIO0
RFM_INT/3: U13.11 U14.DIO0
RFM_INT/4: U17.11 U18.DIO0
RFM_INT/5: U21.11 U22.DIO0
RFM_INT/26: U1.11 U2.DIO0
RFM_RST: R5.1 U2.!RESET
RFM_RST1: R12.1 U6.!RESET
RFM_RST2: R21.1 U10.!RESET
RFM_RST3: R28.1 U14.!RESET
RFM_RST4: R35.1 U18.!RESET
RFM_RST5: R42.1 U22.!RESET
RXI: J9.8 U1.34 U5.2
RXI1: J11.8 U4.34 U8.2
RXI2: J17.8 U9.34 U12.2
RXI3: J23.8 U13.34 U16.2
RXI4: J29.8 U17.34 U20.2
RXI5: J35.8 U21.34 U24.2
SCK: J4.3 U1.13 U2.SCK
SCK1: J12.3 U4.13 U6.SCK
SCK2: J18.3 U9.13 U10.SCK
SCK3: J24.3 U13.13 U14.SCK
SCK4: J30.3 U17.13 U18.SCK
SCK5: J36.3 U21.13 U22.SCK
SCL: J3.4 J9.2 U1.36
SCL1: J6.4 J11.2 U4.36
SCL2: J14.4 J17.2 U9.36
SCL3: J20.4 J23.2 U13.36
SCL4: J26.4 J29.2 U17.36
SCL5: J32.4 J35.2 U21.36
SDA: J3.3 J9.1 U1.33
SDA1: J6.3 J11.1 U4.33
SDA2: J14.3 J17.1 U9.33
SDA3: J20.3 J23.1 U13.33
SDA4: J26.3 J29.1 U17.33
SDA5: J32.3 J35.1 U21.33
SHIELD: J1.SHIELD J1.SHIELD2 J1.SHIELD3 J1.SHIELD4 J1.SHIELD5 J1.SHIELD6 J1.SHIELD7 J1.SHIELD8 J1.SHIELD9 J1.SHIELD10
SHIELD1: J2.SHIELD J2.SHIELD2 J2.SHIELD3 J2.SHIELD4 J2.SHIELD5 J2.SHIELD6 J2.SHIELD7 J2.SHIELD8 J2.SHIELD9 J2.SHIELD10
SHIELD2: J13.SHIELD J13.SHIELD2 J13.SHIELD3 J13.SHIELD4 J13.SHIELD5 J13.SHIELD6 J13.SHIELD7 J13.SHIELD8 J13.SHIELD9 J13.SHIELD10
SHIELD3: J19.SHIELD J19.SHIELD2 J19.SHIELD3 J19.SHIELD4 J19.SHIELD5 J19.SHIELD6 J19.SHIELD7 J19.SHIELD8 J19.SHIELD9 J19.SHIELD10
SHIELD4: J25.SHIELD J25.SHIELD2 J25.SHIELD3 J25.SHIELD4 J25.SHIELD5 J25.SHIELD6 J25.SHIELD7 J25.SHIELD8 J25.SHIELD9 J25.SHIELD10
SHIELD5: J31.SHIELD J31.SHIELD2 J31.SHIELD3 J31.SHIELD4 J31.SHIELD5 J31.SHIELD6 J31.SHIELD7 J31.SHIELD8 J31.SHIELD9 J31.SHIELD10
TXO: J9.9 U1.35 U5.3
TXO1: J11.9 U4.35 U8.3
TXO2: J17.9 U9.35 U12.3
TXO3: J23.9 U13.35 U16.3
TXO4: J29.9 U17.35 U20.3
TXO5: J35.9 U21.35 U24.3
V_USB: C3.1 J1.VBUS U3.1 U3.3
V_USB1: C10.1 J2.VBUS U7.1 U7.3
V_USB2: C17.1 J13.VBUS U11.1 U11.3
V_USB3: C24.1 J19.VBUS U15.1 U15.3
V_USB4: C31.1 J25.VBUS U19.1 U19.3
V_USB5: C38.1 J31.VBUS U23.1 U23.3